# Altium PCB MCU.PcbDoc
Units mil, origin at the board's own origin, x right, y up, seen from the top; angles counter-clockwise.
Board outline 1670 x 1220 mil, 2 copper layers (Top Layer, Bottom Layer); 32 components, 40 nets, 147 pads, 73 vias.
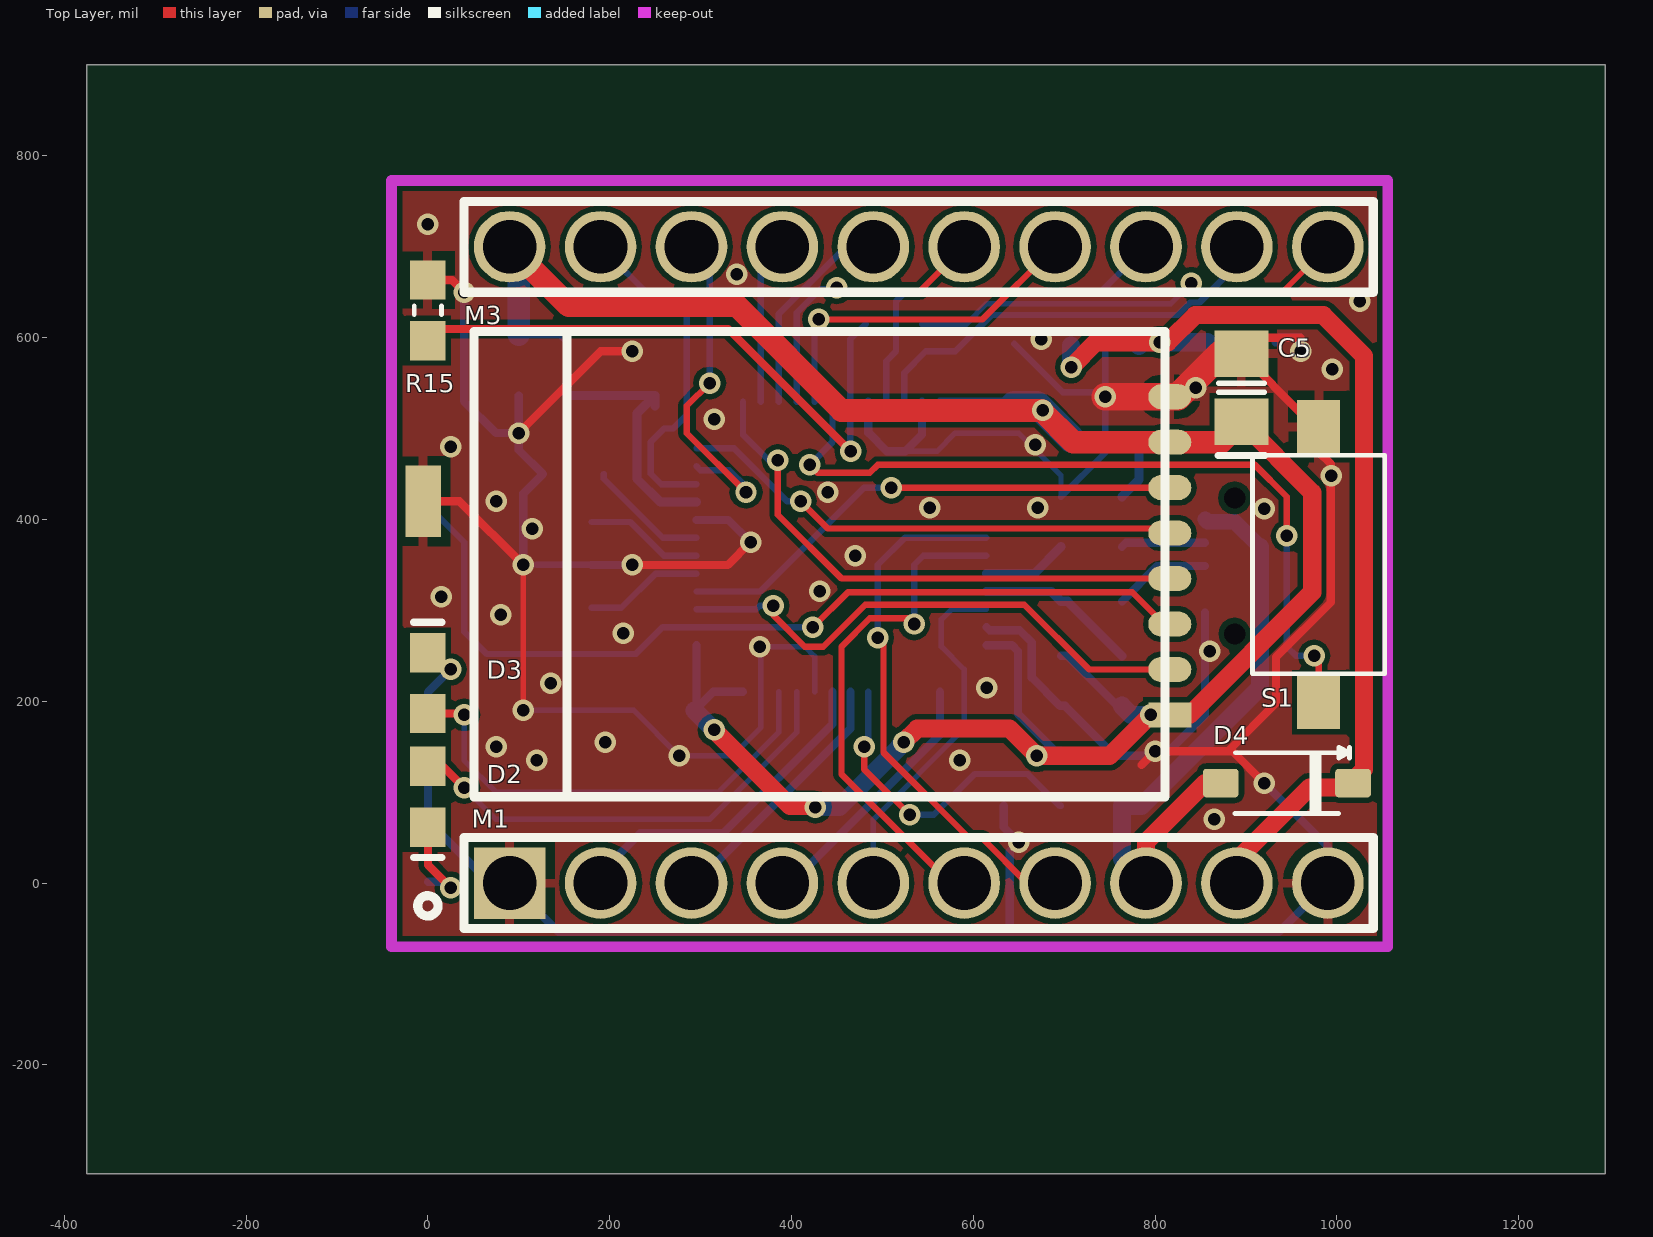
[diagram p0: Top Layer view]
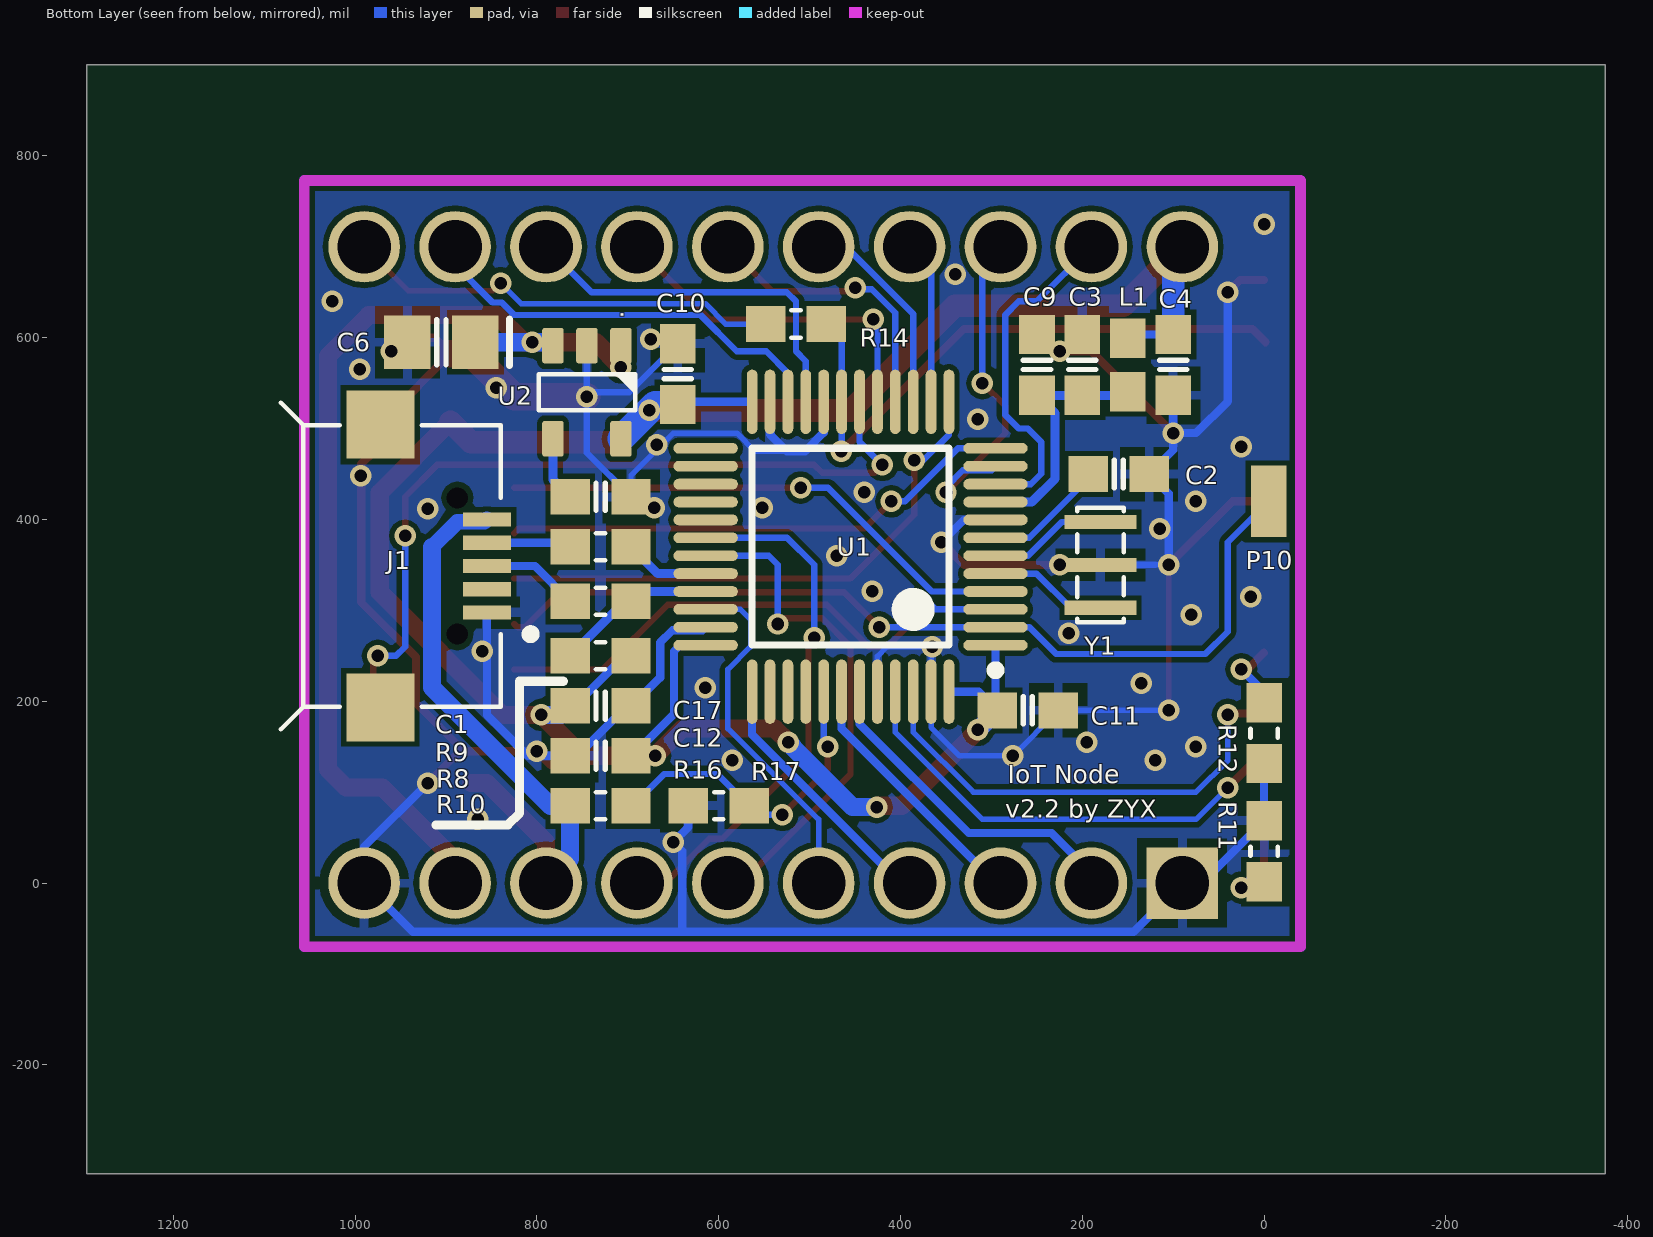
[diagram p1: Bottom Layer view, seen from below]
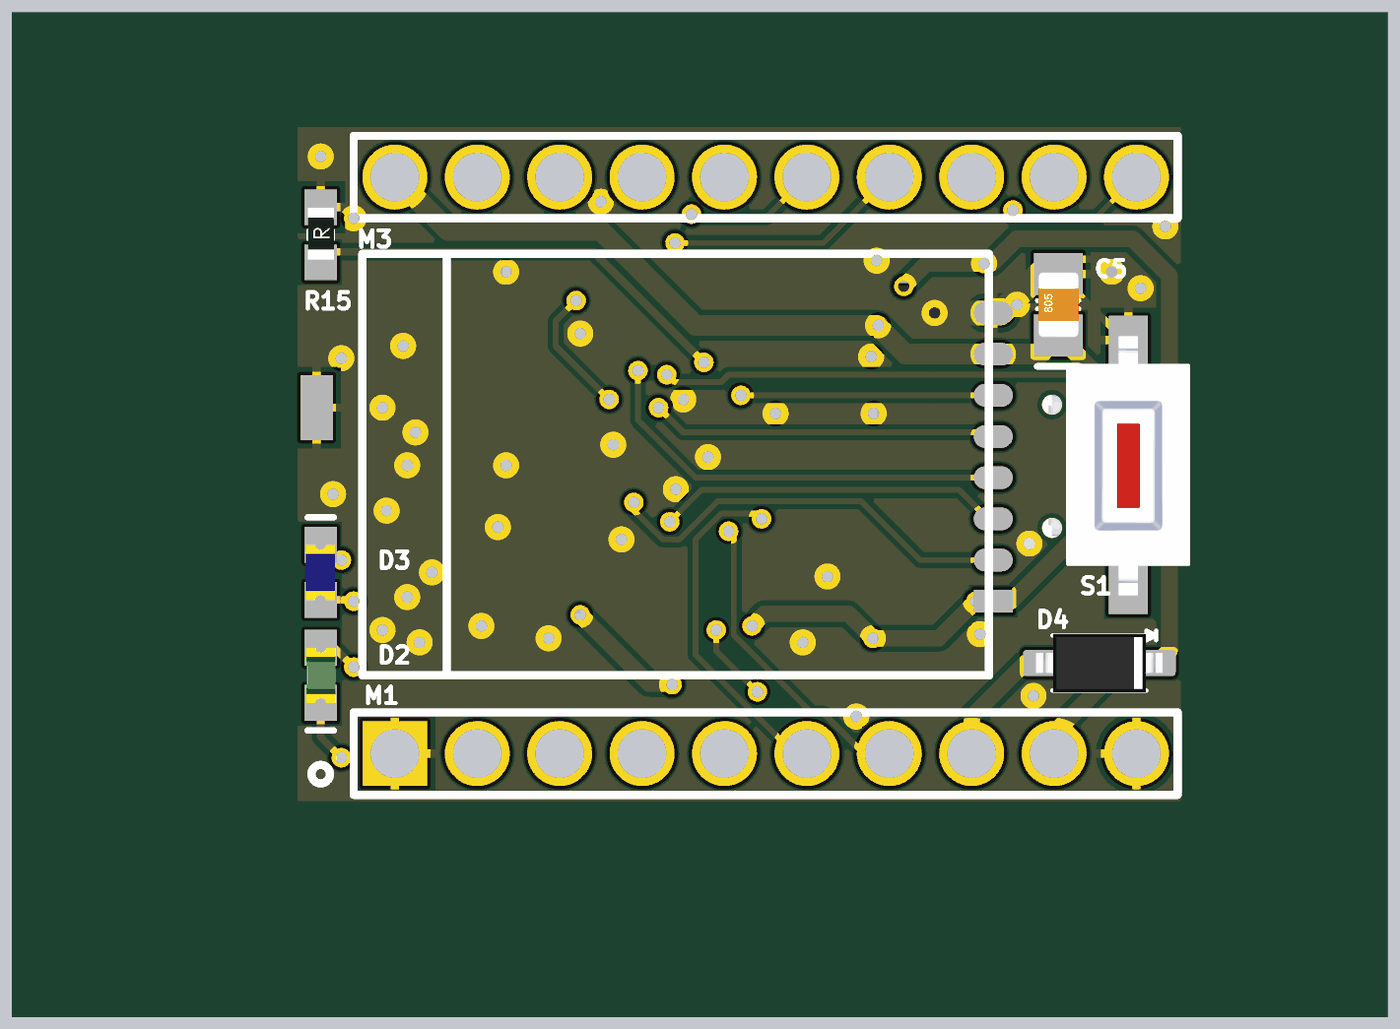
[diagram p2: 3D render of the assembled board from above, using the file's embedded part models]
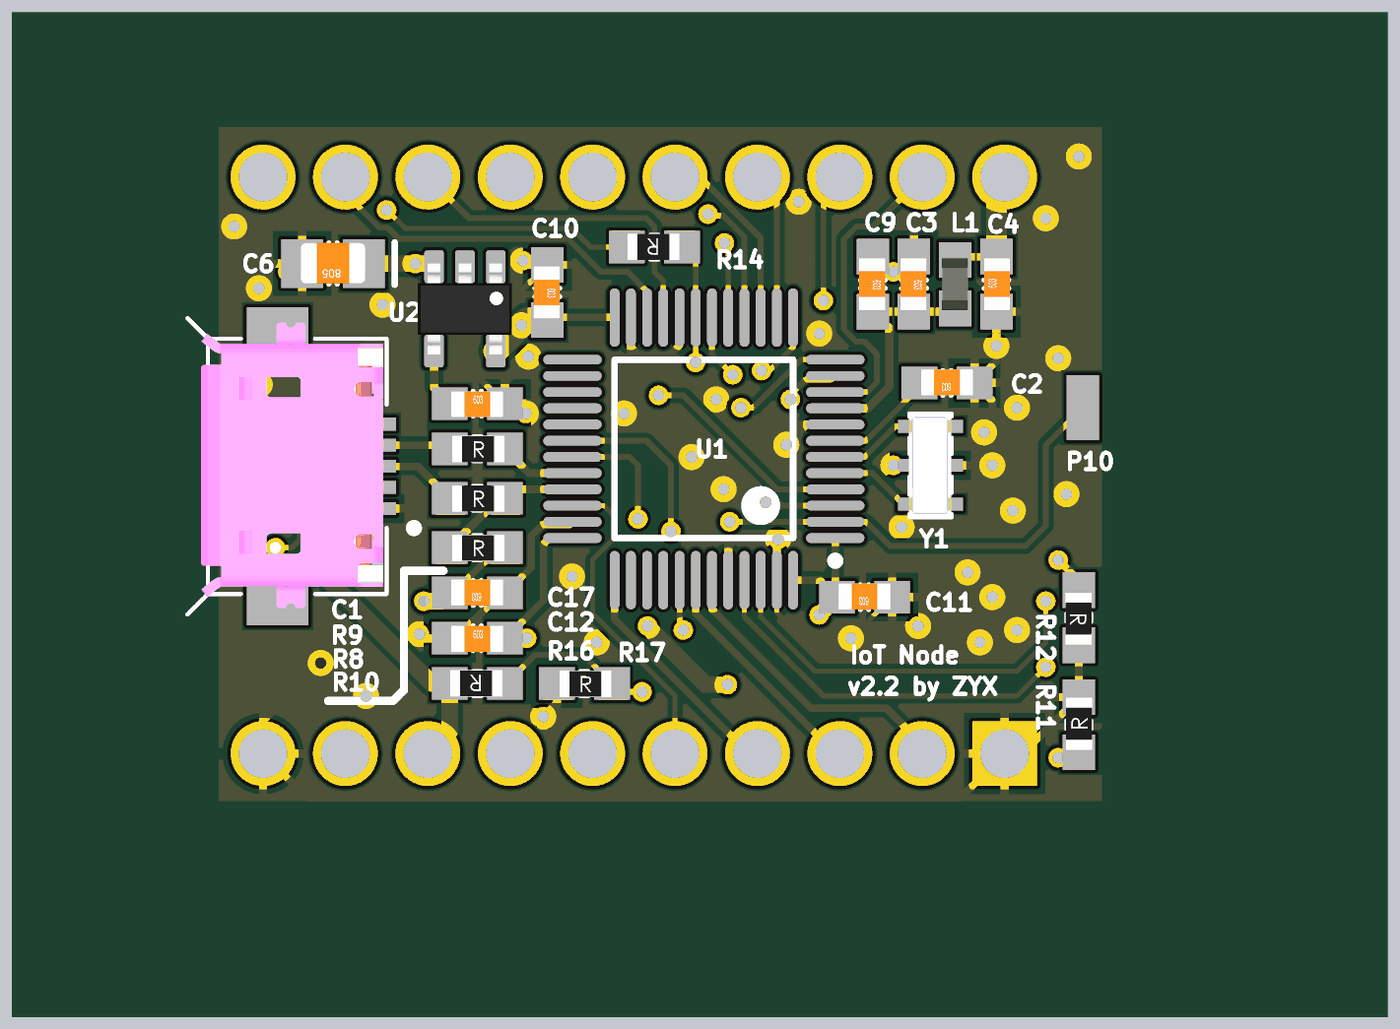
[diagram p3: 3D render of the assembled board from below, using the file's embedded part models]

## Layer stack, top to bottom
Top Solder: solder mask 0.4, Solder Resist, Dk 3.5
Top Layer: signal copper 1.4
Dielectric1: dielectric 12.6, FR-4, Dk 4.8
Bottom Layer: signal copper 1.4
Bottom Solder: solder mask 0.4, Solder Resist, Dk 3.5

## Board outline
-375,-320 1295,-320 1295,900 -375,900

## Design rules (kind name [scope] priority, off if disabled: settings)
Clearance [All] p1: gap=6
ComponentClearance [All] p1: gap=0 collisioncheckmode=3 verticalgap=0 showdistances=FALSE
DiffPairsRouting [All] p1: maxlimit=10 minlimit=10 mostfreqgap=10 toplayer_minwidth=15 toplayer_maxwidth=15 toplayer_prefwidth=15 bottomlayer_minwidth=15 bottomlayer_maxwidth=15 bottomlayer_prefwidth=15 maxuncoupledlength=500
HoleToHoleClearance [All] p1: gap=7.87 allowstackedmicrovias=TRUE
MinimumSolderMaskSliver [All] p1: minsoldermaskwidth=0
PolygonConnect PolygonConnect_1 [isvia vs IsPolygon] p1: connectstyle=Direct reliefconductorwidth=10 reliefentries=4 polygonreliefangle="90 Angle" airgapwidth=10
PolygonConnect [All] p2: connectstyle=Relief reliefconductorwidth=10 reliefentries=4 polygonreliefangle="90 Angle" airgapwidth=10
RoutingVias [All] p1: holewidth=13.78 width=23.62 viastyle="Through Hole" minholewidth=11.81 minwidth=19.68 maxholewidth=13.78 maxwidth=23.62
SilkToSilkClearance [All] p1: silktosilkclearance=0
SilkToSolderMaskClearance SilkscreenOverComponentPads [IsPad] p1: minsilkscreentomaskgap=0 clearancetoexposedcopper=TRUE
SolderMaskExpansion [All] p1: expansion=4
Width [All] p1: maxlimit=30 minlimit=6 preferedwidth=9
23 further rules are at their usual default settings.

## Classes and differential pairs
differential pair USB: +USB_P -USB_N

## Components (designator, comment, footprint, x,y, rotation, side; value= is the part's Value field where it differs from the comment)
C1 "Cap Semi" C-1608[0603] 730,425 r180 bottom
C2 "Cap Semi" C-1608[0603] 160,450 r0 bottom
C3 "Cap Semi" C-1608[0603] 200,570 r270 bottom
C4 "Cap Semi" C-1608[0603] 100,570 r90 bottom
C5 "Cap Semi" C-2012[0805] 895,545 r90 top
C6 "Cap Semi" C-2012[0805] 905,595 r0 bottom
C9 "Cap Semi" C-1608[0603] 250,570 r270 bottom
C10 "Cap Semi" C-1608[0603] 645,560 r270 bottom
C11 "Cap Semi" C-1608[0603] 260,190 r0 bottom
C12 "Cap Semi" C-1608[0603] 730,140 r180 bottom
C17 "Cap Semi" C-1608[0603] 730,195 r0 bottom
D2 "G" LED-1608[0603]-G 0,95 r270 top
D3 "B" LED-1608[0603]-B 0,220 r90 top
D4 "1N5819" SOD123 945,110 r180 top
J1 "USB Micro Type B" "MICRO USB 3D" 855,400 r0 bottom
L1 "Inductor" L-1608[0603] 150,570 r270 bottom
M1 "ESP8266-ESP11" ESP8266-ESP11 51.18,95 r0 top
M3 "MCU_IF_V2" MCU_IF_V2 90,0 r90 top
P10 "ESP_Prog" EDGE_1 -5,420 r90 bottom
R8 "Res Semi" R-1608[0603] 730,310 r180 bottom
R9 "Res Semi" R-1608[0603] 730,370 r180 bottom
R10 "Res Semi" R-1608[0603] 730,250 r180 bottom
R11 "Res Semi" R-1608[0603] 0,35 r90 bottom
R12 "Res Semi" R-1608[0603] 0,165 r270 bottom
R14 "Res Semi" R-1608[0603] 515,615 r0 bottom
R15 "Res Semi" R-1608[0603] 0,630 r90 top
R16 "Res Semi" R-1608[0603] 730,85 r0 bottom
R17 "Res Semi" R-1608[0603] 600,85 r180 bottom
S1 "Button" SW-2PIN-SMD 980,195 r90 top
U1 "STM32F103CBT6" LQFP48_N 455,370 r0 bottom
U2 "MIC5219-3.3" SOT23-5 745,540 r270 bottom
Y1 "8M" Crystal_C 180,350 r90 bottom

## Footprints (in the part's own frame and the unit in brackets; to place one, negate y for a bottom-side part, rotate by r counter-clockwise, add the part's x,y. Pads: shape width x height; smd on the part's side, far side on the other; paste and mask are expansions set on the pad)
C-1608[0603] [mm] "Chip Capacitor; Body 1.6 x 0.8 mm (LxW typ)"
  rect 1.1x1 smd: 1(-0.85,0) 2(0.85,0)
  silkscreen extent -0.13,-0.38 0.13,0.38, body extent -0.8,-0.42 0.8,0.38, height 0.29
C-2012[0805] [mm] "Chip Capacitor; Body 2.0 x 1.2 mm (LxW typ)"
  rect 1.3x1.5 smd: 1(-0.95,0) 2(0.95,0)
  silkscreen extent -1.9,-0.65 0.13,0.65, body extent -1,-0.64 1,0.62, height 0.78
Crystal_C [mm] "含电容晶振，村田 3."
  rect 0.4x2 smd: 1(-1.2,0) 2(0,0) 3(1.2,0)
  silkscreen extent -1.6,-0.65 1.6,0.65, body extent -1.6,-0.64 1.6,0.67, height 0.7
EDGE_1 [mm]
  rect 2x1 smd: 1(0,0)
  rect 2x1 smd far side: 2(0,0)
ESP8266-ESP11 [mil]
  rect 47.24x27.56 smd: 1(765,90)
  oval 47.24x27.56 smd: 2(765,140) 3(765,190) 4(765,240) 5(765,290) 6(765,340) 7(765,390) 8(765,440)
  silkscreen extent -1,0 760,512
L-1608[0603] [mm] "Chip Inductor, Body 1.6x0.8mm, IPC Medium Density"
  rect 1.1x1 smd: 1(-0.75,0) 2(0.75,0)
  body extent -0.8,-0.41 0.8,0.39, height 0.45
LED-1608[0603]-B [mm] "Chip Diode; Body 1.6 x 0.8 mm (LxW typ)"
  rect 1.1x1 smd: 1(-0.85,0) 2(0.85,0)
  silkscreen extent 1.7,-0.4 1.7,0.4, body extent -0.85,-0.44 0.85,0.46, height 0.9
LED-1608[0603]-G [mm] "Chip Diode; Body 1.6 x 0.8 mm (LxW typ)"
  rect 1.1x1 smd: 1(-0.85,0) 2(0.85,0)
  silkscreen extent 1.7,-0.4 1.7,0.4, body extent -0.85,-0.44 0.85,0.46, height 0.9
LQFP48_N [mm] "Thin QFP, 48-Leads, Body 7x7mm, Pitch 0.5mm, IPC Medium Density"
  oval 1.8x0.3 smd: 1(-4.05,2.75) 2(-4.05,2.25) 3(-4.05,1.75) 4(-4.05,1.25) 5(-4.05,0.75) 6(-4.05,0.25) 7(-4.05,-0.25) 8(-4.05,-0.75) 9(-4.05,-1.25) 10(-4.05,-1.75) 11(-4.05,-2.25) 12(-4.05,-2.75) 25(4.05,-2.75) 26(4.05,-2.25) 27(4.05,-1.75) 28(4.05,-1.25) 29(4.05,-0.75) 30(4.05,-0.25) 31(4.05,0.25) 32(4.05,0.75) 33(4.05,1.25) 34(4.05,1.75) 35(4.05,2.25) 36(4.05,2.75)
  oval 0.3x1.8 smd: 13(-2.75,-4.05) 14(-2.25,-4.05) 15(-1.75,-4.05) 16(-1.25,-4.05) 17(-0.75,-4.05) 18(-0.25,-4.05) 19(0.25,-4.05) 20(0.75,-4.05) 21(1.25,-4.05) 22(1.75,-4.05) 23(2.25,-4.05) 24(2.75,-4.05) 37(2.75,4.05) 38(2.25,4.05) 39(1.75,4.05) 40(1.25,4.05) 41(0.75,4.05) 42(0.25,4.05) 43(-0.25,4.05) 44(-0.75,4.05) 45(-1.25,4.05) 46(-1.75,4.05) 47(-2.25,4.05) 48(-2.75,4.05)
  silkscreen extent -4.17,-2.75 2.75,3.57, body extent -3.5,-3.5 3.5,3.5, height 1.6
MCU_IF_V2 [mm]
  rect 2x2 hole 1.5: 1(0,0)
  round 2 hole 1.5: 2(0,-2.54) 3(0,-5.08) 4(0,-7.62) 5(0,-10.16) 6(0,-12.7) 7(0,-15.24) 8(0,-17.78) 9(0,-20.32) 10(0,-22.86) 11(17.78,-22.86) 12(17.78,-20.32) 13(17.78,-17.78) 14(17.78,-15.24) 15(17.78,-12.7) 16(17.78,-10.16) 17(17.78,-7.62) 18(17.78,-5.08) 19(17.78,-2.54) 20(17.78,0)
  silkscreen extent -1.27,-24.13 19.05,1.27
"MICRO USB 3D" [mm]
  rect 1.35x0.4 smd: 1(0,0) 2(0,0.65) 3(0,1.3) 4(0,1.95) 5(0,2.6)
  round 0 hole 0.6: HOLE(0.827,-0.6) HOLE(0.827,3.2)
  rect 1.9x1.9 smd: ""(2.977,-2.65) ""(2.977,5.25)
  silkscreen extent -1.35,-3.27 5.76,5.87, body extent -0.29,-3.13 5.33,5.67, height 2.79
R-1608[0603] [mm] "Chip Resistor; Body 1.6 x 0.8 mm (LxW typ)"
  rect 1.1x1 smd: 1(-0.85,0) 2(0.85,0)
  silkscreen extent -0.13,-0.38 0.13,0.38, body extent -1.27,-0.51 1.33,0.49, height 0.48
SOD123 [mm] "SOD-123; 2 Leads; Body 2.7 x 1.6 mm, (LxW)"
  round 0.508 on Mech15: 0(0,0)
  rrect25% 1x0.8 smd: 1(1.85,0) 2(-1.85,0)
  silkscreen extent -1.75,-1 1.45,0.85, body extent -1.95,-0.9 1.95,0.9, height 1.18
SOT23-5 [mm]
  round 0.5 on Mech15: 0(0,0)
  rrect25% 1x0.6 smd: 1(-1.3,0.95) 2(-1.3,0) 3(-1.3,-0.95) 4(1.3,-0.95) 5(1.3,0.95)
  silkscreen extent -0.51,-1.35 0.51,1.35, body extent -1.4,-1.45 1.4,1.45, height 1.44
SW-2PIN-SMD [mm] "3*6*2.5mm Button"
  rect 1.5x1.2 smd: 1(0.1,0) 2(7.8,0)
  silkscreen extent 0.9,-1.85 7,1.85, body extent -0.08,-1.8 7.92,1.8, height 2.5

## Part data
C1 C2 C3 C4 C5 C6 C9 C10 C11 C12 C17: "Capacitor (Semiconductor SIM Model)"
D2: library part LED2, "Green LED"
D3: library part LED2, "Blue LED"
D4: library part "D Schottky", "Schottky Diode"
J1: library part USB_Micro_TypeB, "Connector SMD USB Micro Type B middle mount"
M3: library part MCU_IF_V1
P10: library part "Header 2", "Header, 2-Pin"
R8 R9 R10 R11 R12 R14 R15 R16 R17: "Semiconductor Resistor"
S1: library part SW-PB, "Switch"
U1: "STM32 ARM-based 32-bit MCU with 128 Kbytes Flash, 48-pin LQFP, Industrial Temperature"
U2: library part MIC5219, "500mA-Peak Output LDO Regulator"
Y1: library part XTAL_C, "Crystal Oscillator"

## Via types
v1: diameter 23.62, hole 13.78, Top Layer to Bottom Layer, 73 vias

## Nets (pads, with @x,y where several pads share a name; then routed paths per layer and width w, separated by ;. In a path a pad name is that pad's centre, name@x,y a point inside that pad or via, vN(x,y) a via of type N, cw(c..) or ccw(c..) an arc to the next point about the centre after c; other vN are vias at no path point)
AVCC: C3.2 C9.2 L1.2 U1.9 | length 289.2
  Bottom Layer w10: L1.2 153.94,536.54 C3.2 C9.2 ; C9.2@250,525 C9.2 ; U1.9 255.79,419.21 230,445 230,516.54 C9.2
GND: C1.2 C2.1 C3.1 C4.1 C5.2 C6.2 C9.1 C10.1 C11.1 C12.1 C17.1 J1.5 M1.8 M3.1 M3.10 P10.2 R11.2 R12.2 R15.2 R17.1 S1.2 U1.8 U1.20 U1.23 U1.35 U1.44 U1.47 U2.2 Y1.2 | length 5233.5
  Top Layer w6: v1(105,190) v1(105,350)
  Top Layer w9: P10.2 35,420 v1(105,350) ; R15.2 26.54,663.46 v1(40,650) ; v1(100,495) 190,585 v1(225,585) ; v1(225,350) 330,350 v1(355,375) ; 785,130 v1(800,145) ; v1@805,145 885.14,145 v1@920,110.14 ; 880,145 933,198 933,248.62 993.31,308.93 993.31,461.09 980,474.4 S1.2 ; v1(960,585) 960,600 912.6,600 C5.2 965,512.4 S1.2@965,502.09
  Top Layer w30: v1(745,535) 825,535 872.4,582.4 C5.2
  Bottom Layer w6: v1(105,190) C11.1 v1(276.54,140) 335,140 366.42,171.42 U1.47 366.42,251.42 375,260 415,260 425.47,249.53 U1.44 ; v1(105,350) 120,350 ; 525,475 560,475 580,495 650,495 696.54,448.46 C1.2
  Bottom Layer w7: 120,350 Y1.2 ; C10.1 698.46,540 v1@745,540 ; C1.2 745,473.46 v1(745,535) v1@745,540 ; U2.2 v1@745,540
  Bottom Layer w9: R12.2 R11.2 68.46,0 M3.1 143.59,-53.59 640,-53.59 ; v1(40,650) 40,530 75,495 v1(100,495) ; C4.1 v1(100,495) ; v1(105,350) 105,428.46 C2.1 100,476.54 v1(100,495) ; Y1.2 v1(225,350) ; U1.8 330.47,399.53 v1(355,375) ; U1.20 484.53,495.47 505,475 525,475 543.58,493.58 U1.23 ; U1.35 617.73,278.14 650.77,278.14 664.38,264.53 664.38,225.97 695.35,195 C17.1 701.13,195 756.13,140 C12.1 810,140 855,185 J1.5 ; R17.1 633.46,61.54 v1(650,45) 640.13,35.13 640.13,-53.46 640,-53.59 ; 649.87,-53.46 650,-53.59 ; v1(920,110) 990,40 M3.10 936.41,-53.59 650,-53.59 ; C6.2@932.4,595 937.4,600 960,600 v1(960,585) ; 640,-53.59 650,-53.59
  other v1: 865,70 120,135 585,135 75,150 195,155 615,215 135,220 860,255 365,260 215,275 80,295 15,315 431,321 470,360 115,390 920,412 552,413 671,413 75,420 440,430 994,448 25,480 668,482 315,510 845,545 995,565 674.68,598.46 1025,640 340,670 0,725
KEY: S1.1 U1.18 | length 878.8
  Top Layer w7: v1(420,460) 428.69,451.31 486.31,451.31 495,460 910,460 945,425 v1(945,382) ; v1(975,250) 980,245 S1.1
  Bottom Layer w7: v1(420,460) 445.16,485.16 U1.18 ; v1(945,382) 945,260 955,250 v1(975,250)
LED_B: D3.1 U1.46 | length 523.1
  Top Layer w9: D3.1 38.46,186.54 v1(40,185)
  Bottom Layer w6: v1(40,185) 40,135 75,100 320,100 386.1,166.1 U1.46
LED_G: D2.1 U1.45 | length 514.4
  Top Layer w9: D2.1 16.54,128.46 v1(40,105)
  Bottom Layer w6: v1(40,105) 75,70 310,70 405.79,165.79 U1.45
NetC1_1: C1.1 U2.4 | length 71.7
  Bottom Layer w10: C1.1 782.4,443.94 U2.4
NetC2_2: C2.2 U1.7 | length 134.1
  Bottom Layer w7: C2.2 193.46,444.92 258.54,379.84 U1.7
NetD2_2: D2.2 R11.1 | length 104.6
  Top Layer w9: D2.2 0,20 v1(25,-5)
  Bottom Layer w9: R11.1 18.46,1.54 v1(25,-5)
NetD3_2: D3.2 R12.1 | length 79.5
  Top Layer w9: D3.2 18.46,235 v1(25,235)
  Bottom Layer w9: R12.1 0,210 v1(25,235)
NetJ1_2: J1.2 R9.1 | length 93.4
  Bottom Layer w9: R9.1 767.87,374.41 J1.2
NetJ1_3: J1.3 R8.1 | length 107.6
  Bottom Layer w9: R8.1 802.28,348.82 J1.3
NetR14_1: R14.1 R15.1 U1.19 | length 678.2
  Top Layer w9: R15.1@-1.54,595 12.96,609.5 330.5,609.5 460,480 v1@470,480
  Bottom Layer w7: v1(465,475) 464.84,475.16 U1.19 464.84,598.31 R14.1
NetU1_5: U1.5 Y1.1 | length 131.2
  Bottom Layer w7: Y1.1 212.76,302.76 250.47,340.47 U1.5
NetU1_6: U1.6 Y1.3 | length 130.9
  Bottom Layer w7: Y1.3 222.76,397.24 259.84,360.16 U1.6
PA0: M3.19 U1.10 | length 378.1
  Bottom Layer w7: M3.19 250,640 270,640 285,625 285,515 270,500 260,500 245.25,485.25 245.25,450.25 256.61,438.9 U1.10
PA1: M3.18 U1.11 | length 385.2
  Top Layer w7: v1(310,550) 285,525 285,495 v1(350,430)
  Bottom Layer w7: M3.18 310,680 v1(310,550) ; U1.11 299.83,454.3 331.46,454.3 350,435.76 v1(350,430)
PA4: M3.17 U1.14 | length 180.3
  Bottom Layer w7: U1.14 366.42,676.42 M3.17
PA5: M3.16 U1.15 | length 231.2
  Bottom Layer w7: U1.15 386.1,626.1 460,700 M3.16
PA6: M3.15 U1.16 | length 315.4
  Top Layer w7: v1(450,655) 453.87,651.13 541.13,651.13 M3.15
  Bottom Layer w7: U1.16 405.79,627.4 431.69,653.31 448.31,653.31 v1(450,655)
PA7: M3.14 U1.17 | length 385.6
  Top Layer w7: v1(430,620) 610,620 M3.14
  Bottom Layer w7: U1.17 425.38,529.54 425.38,615.38 v1(430,620)
PA9: M3.7 U1.30 | length 588.9
  Top Layer w7: v1(495,270) 501.31,263.69 501.31,143.69 596.13,48.87 610.24,48.87 659.11,0 M3.7
  Bottom Layer w7: v1(495,270) 495,350 524.84,379.84 U1.30
PA10: M3.6 U1.31 | length 569.4
  Top Layer w7: v1(535,285) 528.69,291.31 486.17,291.31 455,260.14 455,119.86 564.86,10 580,10 M3.6
  Top Layer w9: M3.6@589.74,0 M3.6
  Bottom Layer w7: v1(535,285) 535,350 545.16,360.16 U1.31
PA13: M3.5 U1.34 | length 395.8
  Bottom Layer w6: M3.5 490,70 590,170 590,235 565,260 565,290 576.1,301.1 U1.34
PA14: M3.4 U1.37 | length 288.2
  Bottom Layer w9: M3.4 400,0 563.27,163.27 U1.37
PB6: M3.3 U1.42 | length 283.9
  Bottom Layer w9: M3.3@288.12,9.38 304.38,9.38 464.84,169.84 U1.42
PB7: M3.2 U1.43 | length 358.4
  Bottom Layer w9: M3.2@190,11.25 233.75,55 325,55 445.16,175.16 U1.43
PB10: M3.13 U1.21 | length 414.9
  Bottom Layer w7: U1.21 504.21,574.21 515,585 515,640 525,650 740,650 M3.13
PB11: M3.12 U1.22 | length 467.1
  Bottom Layer w7: U1.22 523.9,561.08 547.82,585 580,585 620,625 825,625 838.69,638.69 848.83,638.69 890,679.86 M3.12
USB_DET: R16.1 R17.2 U1.41 | length 362.8
  Top Layer w7: v1@480,155.03 v1(480,150.02) 480,125 v1(530,75)
  Bottom Layer w7: v1(480,150.02) 484.53,154.54 U1.41 ; v1(530,75) 556.54,75 R17.2 601.54,120 659.86,120 694.86,85 R16.1
USB_N: R9.2 U1.32 | length 94.3
  Bottom Layer w10: U1.32 667.01,340.47 R9.2
USB_P: R8.2 R10.1 U1.33 | length 178.3
  Bottom Layer w10: U1.33 685.75,320.79 R8.2 703.46,310 R10.1
VBAT: M3.11 R14.2 | length 488.7
  Top Layer w6: v1(840,660) 848.37,651.63 941.63,651.63 M3.11
  Bottom Layer w6: R14.2@543.46,615 592.32,615 614.82,637.5 817.5,637.5 v1(840,660)
VCC: C4.2 C5.1 C10.2 C11.2 C12.2 C17.2 L1.1 M1.1 M1.7 M3.20 R10.2 U1.1 U1.24 U1.36 U1.48 U2.5 | length 2738.5
  Top Layer w20: v1(315,168.46) 398.46,85 425,85 v1(426.38,83.62) ; v1(523.45,155) 538.45,170 640,170 v1(670,140) 750,140 v1(795,185) 837.87,185 972.81,319.94 972.81,429.79 C5.1
  Top Layer w25: M3.20 155,635 340,635 455,520 675,520 710,485 872.4,485 C5.1
  Bottom Layer w9: C4.2 146.06,603.46 L1.1 ; C11.2 C11.2@295.55,192.09 ; U1.1 C11.2@295.55,192.09 ; U1.48 314.02,210.55 C11.2@295.55,192.09 ; U1.24 642.09,529.45 C10.2 ; U1.36 642.65,261.73 649.38,255 649.38,185.97 695.35,140 C12.2 ; R10.2 703.87,250 758.87,195 C17.2
  Bottom Layer w20: C11.2 v1(315,168.46) ; v1(426.38,83.62) 452.93,83.62 518.45,149.13 518.45,150 v1(523.45,155) ; v1(670,140) C12.2@695.35,140 ; C17.2 773.46,185 v1(795,185)
  Bottom Layer w25: M3.20 100,690 C4.2
  Bottom Layer w30: C10.2 669.88,526.54 U2.5
  other v1: 676.42,520
VDD: C6.1 D4.2 M3.9 U2.1 U2.3 | length 1119.6
  Top Layer w20: v1(707.6,567.4) 735.2,595 v1(805,595) 814.26,595 844.26,625 985,625 1030,580 1030,125 1010,105 970,105 M3.9@877.5,12.5
  Bottom Layer w20: v1(707.6,567.4) U2.1 ; U2.3 786.22,595 v1(805,595) C6.1@857.6,595
VUSB: D4.1 J1.1 M3.8 R16.2 | length 683.2
  Top Layer w20: M3.8 790,45 855,110 D4.1
  Bottom Layer w17: J1.1 857.69,397.31 887.69,397.31 915.37,369.63
  Bottom Layer w20: M3.8 763.46,26.54 R16.2 785,85 915.37,215.37 915.37,369.63
W_IO0: M1.3 P10.1 U1.2 | length 1002.9
  Top Layer w7: v1(423.58,281.42) 462.17,320 775,320 813.58,281.42 821.42,281.42 M1.3@825,285
  Bottom Layer w7: P10.1 40,375 40,276.62 64.62,252 228.77,252 258.19,281.42 U1.2 v1(423.58,281.42)
W_IO2: M1.2 U1.3 | length 604.4
  Top Layer w7: v1(380,305) 380,294.86 414.76,260.11 424.89,260.11 425,260 435,260 481.31,306.31 656.19,306.31 727.5,235 M1.2@825,235
  Bottom Layer w7: U1.3 361.1,301.1 365,305 v1(380,305)
W_RST: M1.6 U1.4 | length 576.8
  Top Layer w7: v1(510,435) M1.6@825,435
  Bottom Layer w7: U1.4 365.65,320.79 479.86,435 v1(510,435)
W_RXD: M1.5 U1.12 | length 568.2
  Top Layer w7: v1(410,420) 440,390 820,390 M1.5@825,385
  Bottom Layer w7: U1.12 336.73,478.27 395.07,419.93 v1@410,419.93
  Bottom Layer w9: v1@410,419.93 v1(410,420)
W_TXD: M1.4 U1.13 | length 615.2
  Top Layer w7: v1(385,465) 385,405 455,335 M1.4@825,335
  Bottom Layer w7: U1.13 346.73,493.27 375,465 v1(385,465)
pads on no net: D4.0 J1. J1.4 J1.HOLE U1.25 U1.26 U1.27 U1.28 U1.29 U1.38 U1.39 U1.40 U2.0

## Polygon pours and split planes (outlines as drawn)
GND on Bottom Layer "Bottom Layer-No Net" (solid, remove dead copper, pour order 4): -40,773 -40,-70 1056,-70 1056,773
GND on Top Layer "Bottom Layer-No Net" (solid, remove dead copper, pour order 6): -40,773 -40,-70 1056,-70 1056,773

## Keep-outs
Keep-Out Layer:
  lines w11.81: -40,-70 1056,-70 1056,773 -40,773 -40,-70

## Silkscreen, mask and mechanical layers (free items; w line width, h text height)
Top Overlay:
  circle w10: c0,-25 r11.18
Bottom Overlay:
  lines w10: 771,222 819,222 819,77 832,64 911,64
  text "IoT Node" at 282,110 h20
  text "v2.2 by ZYX" at 285,72 h20